# EAGLE board EqualzVer2Duel (EAGLE 5.10)
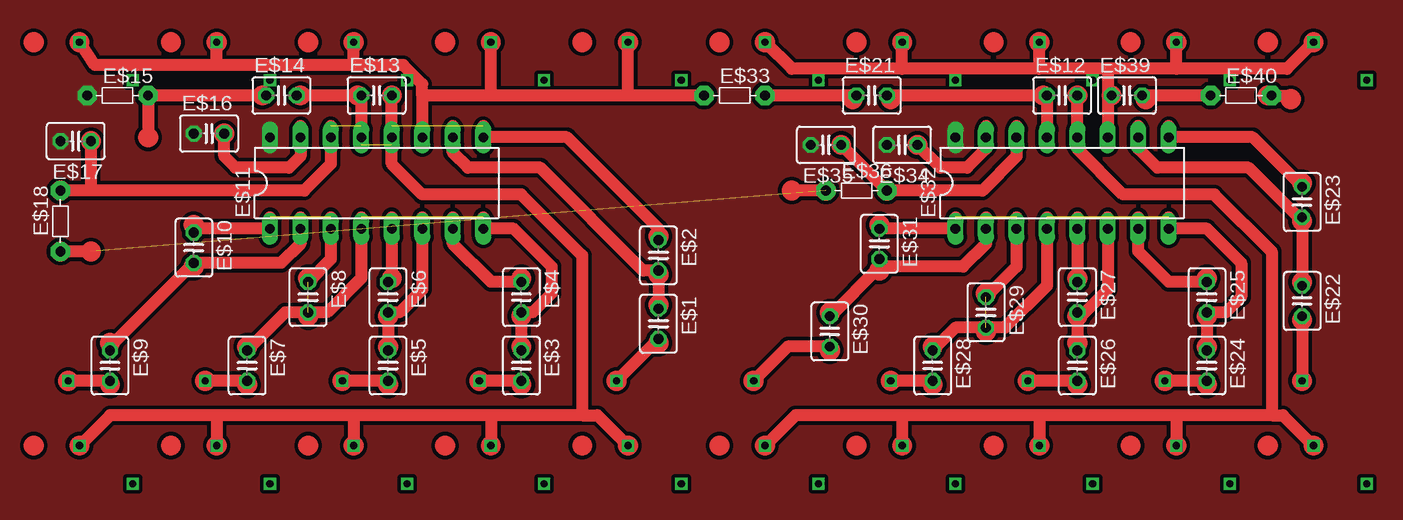
[diagram p0: board, top side]

No outline drawn. Coordinates in mm, seen from the top.
Copper layers (1*16): Top 0.035mm / dielectric 1.5mm / Bottom 0.035mm
Design rules "default": minimum track width 10mil, minimum drill 24mil, track to track 8mil, track to pad 8mil, pad to pad 8mil, via to via 8mil, smd to smd 8mil, copper to edge 40mil, drill to drill 8mil, minimum pad ring 10mil, minimum via ring 8mil, stop-mask expansion 4mil, vias tented up to drill 0mil, thermal gap 10mil

## Footprints (pad centres in the part's own frame; a part is rotated, then mirrored left to right if it is on the bottom)
C025-030X050 = drill 0.813 octagon: 1 -1.27,0; 2 1.27,0
DIL16 = drill 0.813 long: 1 -8.89,-3.81; 2 -6.35,-3.81; 3 -3.81,-3.81; 4 -1.27,-3.81; 5 1.27,-3.81; 6 3.81,-3.81; 7 6.35,-3.81; 8 8.89,-3.81; 9 8.89,3.81; 10 6.35,3.81; 11 3.81,3.81; 12 1.27,3.81; 13 -1.27,3.81; 14 -3.81,3.81; 15 -6.35,3.81; 16 -8.89,3.81
R-5 = drill 0.813 pad 1.6 octagon: 1 -2.54,0; 2 2.54,0

## Placement (x,y rotation side)
E$1  0.0012  [C025-030X050]  50.8,12.7 270 top
E$2  0.022  [C025-030X050]  50.8,18.41 270 top
E$3  0.0012  [C025-030X050]  39.37,9.21 270 top
E$4  0.022  [C025-030X050]  39.37,14.92 270 top
E$5  0.0012  [C025-030X050]  28.26,9.21 270 top
E$6  0.022  [C025-030X050]  28.26,14.92 270 top
E$7  0.0012  [C025-030X050]  16.51,9.21 270 top
E$8  0.022  [C025-030X050]  21.59,14.92 270 top
E$9  0.0012  [C025-030X050]  5.08,9.21 270 top
E$10  0.022  [C025-030X050]  12.06,19.05 270 top
E$11  [DIL16]  27.3,24.45 0 top
E$12  100pf  [C025-030X050]  84.45,31.75 0 top
E$13  100pf  [C025-030X050]  27.3,31.75 0 top
E$14  3.3UF  [C025-030X050]  19.37,31.75 0 top
E$15  10K  [R-5]  5.71,31.75 0 top
E$16  22UF  [C025-030X050]  13.34,28.57 0 top
E$17  47UF  [C025-030X050]  2.22,27.94 180 top
E$18  100  [R-5]  0.95,21.27 90 top
E$21  3.3UF  [C025-030X050]  68.58,31.75 0 top
E$22  0.0012  [C025-030X050]  104.46,14.61 270 top
E$23  0.022  [C025-030X050]  104.46,22.86 270 top
E$24  0.0012  [C025-030X050]  96.52,9.21 270 top
E$25  0.022  [C025-030X050]  96.52,14.92 270 top
E$26  0.0012  [C025-030X050]  85.72,9.21 270 top
E$27  0.022  [C025-030X050]  85.72,14.92 270 top
E$28  0.0012  [C025-030X050]  73.66,9.21 270 top
E$29  0.022  [C025-030X050]  78.11,13.65 270 top
E$30  0.0012  [C025-030X050]  65.09,12.06 270 top
E$31  0.022  [C025-030X050]  69.22,19.37 270 top
E$32  [DIL16]  84.45,24.45 0 top
E$33  10K  [R-5]  57.15,31.75 0 top
E$34  22UF  [C025-030X050]  71.12,27.62 180 top
E$35  47UF  [C025-030X050]  64.77,27.62 180 top
E$36  100  [R-5]  67.31,23.81 0 top
E$39  100pf  [C025-030X050]  89.85,31.75 0 top
E$40  10K  [R-5]  99.38,31.75 0 top

## Library data of the parts
E$1-E$10 E$12-E$14 E$16 E$17 E$21-E$31 E$34 E$35 E$39 = rcl
E$11 E$32 = 40xx
E$15 E$18 E$33 E$36 E$40 = discrete

## Nets
12V: E$18.1 E$36.1
GND: E$11.16 E$15.1 E$16.1 E$17.2 E$32.16 E$34.2 E$35.2
S$3: E$9.2
S$6: E$7.2
S$9: E$5.2
S$10: E$33.1
S$13: E$3.2
S$14: E$31.1 E$32.1
S$18: E$32.15 E$34.1
S$20: E$16.2
S$22: E$30.1 E$32.2
S$23: E$27.1 E$32.5
S$25: E$24.1 E$25.2 E$32.8
S$26: E$23.1 E$32.9
S$27: E$14.1
S$28: E$12.2 E$32.12
S$29: E$12.1 E$21.2 E$32.13
S$31: E$25.1 E$28.1 E$29.1 E$29.2 E$32.3 E$32.4
S$33: E$1.2
S$35: E$30.2
S$36: E$11.1
S$37: E$27.2 E$32.6
S$39: E$5.1 E$6.2 E$11.6
S$40: E$1.1 E$2.2 E$11.10
S$41: E$10.2 E$11.2
S$43: E$11.5
S$47: E$28.2
S$48: E$3.1 E$4.2 E$11.8
S$49: E$2.1 E$11.9
S$51: E$11.13 E$13.1 E$14.2
S$52: E$11.12 E$13.2 E$18.2
S$57: E$22.1 E$23.2
S$59: E$26.2
S$60: E$21.1 E$33.2
S$61: E$40.1
S$63: E$40.2
S$66: E$32.14 E$35.1 E$36.2
S$69: E$4.1 E$7.1 E$8.1 E$8.2 E$11.4 E$11.7
S$71: E$24.2
S$72: E$17.1
S$83: E$22.2

## Tracks (layer width: path | path; a pad name or v marks a point on that pad's centre or on a via)
12V  (1 unrouted)
  Top 1.016: 3.49,18.73 E$18.1
GND
  pour Top (isolate 0.305, no thermals): 120.33,47.94 -13.97,47.94 -13.97,-22.86 120.33,-22.86
S$1  (via drill 0.6)
  other vias: 109.86,-0.64
S$2  (via drill 0.6)
  other vias: 109.86,33.02
S$3  (via drill 0.6)
  Top 1.016: E$9.2 v1.59,7.94
S$4  (via drill 0.6)
  other vias: 98.42,-0.64
S$5  (via drill 0.6)
  other vias: 98.42,33.02
S$6  (via drill 0.6)
  Top 1.016: E$7.2 v13.02,7.94
S$7  (via drill 0.6)
  other vias: 87,-0.64
S$8  (via drill 0.6)
  other vias: 87,33.02
S$9  (via drill 0.6)
  Top 1.016: E$5.2 v24.45,7.94
S$10  (via drill 0.6)
  Top 1.016: 31.11,31.75 31.11,32.7 29.53,34.29 25.4,34.29 | 31.11,31.75 31.11,27.94 | 48.26,31.75 v48.26,36.2 | 36.83,31.75 v36.83,36.2 | 25.4,34.29 v25.4,36.2 | 25.4,34.29 13.97,34.29 | 13.97,34.29 v13.97,36.2 | 13.97,34.29 3.81,34.29 v2.54,36.2 | E$33.1 48.26,31.75 | 48.26,31.75 36.83,31.75 | 36.83,31.75 31.11,31.75
S$11  (via drill 0.6)
  other vias: 75.56,-0.64
S$12  (via drill 0.6)
  other vias: 75.56,33.02
S$13  (via drill 0.6)
  Top 1.016: E$3.2 v35.88,7.94
S$14
  Top 1.016: E$32.1 E$31.1
S$15  (via drill 0.6)
  other vias: 64.14,-0.64
S$16  (via drill 0.6)
  other vias: 64.14,33.02
S$17
  Top 1.016: 64.45,23.81 61.91,23.81
S$18
  Top 1.016: E$34.1 74.3,25.72 76.52,25.72 78.11,27.3 E$32.15 78.11,29.21
S$20
  Top 1.016: E$16.2 14.61,26.67 15.56,25.72 20,25.72 20.95,26.67 20.95,29.21
S$22
  Top 1.016: E$30.1 69.22,17.46 76.2,17.46 78.11,19.37 E$32.2
S$23
  Top 1.016: E$32.5 E$27.1
S$25
  Top 1.016: E$24.1 E$25.2 98.11,13.65 99.38,14.92 99.38,17.78 96.52,20.64 E$32.8
S$26
  Top 1.016: E$32.9 100.33,28.26 E$23.1
S$27
  Top 1.016: E$14.1 8.26,31.75 8.26,28.26
S$28  (via drill 0.6)
  Top 1.016: E$12.2 E$32.12 85.72,27.3 89.53,23.5 97.16,23.5 101.92,18.73 101.92,5.08 | v105.41,2.54 102.87,5.08 101.92,5.08 | 101.92,5.08 93.98,5.08 | 93.98,5.08 82.55,5.08 | 82.55,5.08 71.12,5.08 | 71.12,5.08 62.23,5.08 v59.69,2.54 | 71.12,5.08 v71.12,2.54 | 82.55,5.08 v82.55,2.54 | 93.98,5.08 v93.98,2.54
S$29
  Top 1.016: E$32.13 E$12.1 E$21.2
S$31  (7 unrouted)
  Top 1.016: 75.56,21.59 75.56,20 | 78.11,21.59 78.11,20 | E$32.3 80.64,21.59 | E$32.3 80.64,20 | E$32.3 80.64,17.46 E$29.1 | E$28.1 75.56,12.38 E$29.2 79.69,12.38 83.19,15.88 E$32.4 | E$32.4 83.19,20 | E$32.4 83.19,21.59 | 85.72,21.59 85.72,20 | 93.34,21.59 93.34,20 | 88.27,21.59 88.27,20 | 90.81,21.59 90.81,18.73 93.34,16.19 E$25.1
S$32  (via drill 0.6)
  other vias: 52.7,-0.64
S$33  (via drill 0.6)
  Top 1.016: E$1.2 v47.31,7.94
S$34  (via drill 0.6)
  other vias: 52.7,33.02
S$35  (via drill 0.6)
  Top 1.016: E$30.2 61.59,10.79 v58.74,7.94
S$36
  Top 1.016: E$11.1 12.06,20.64
S$37
  Top 1.016: 85.72,11.43 E$27.2 86.36,13.65 88.27,15.56 E$32.6
S$39
  Top 1.016: E$5.1 E$6.2 29.21,13.65 31.11,15.56 E$11.6
S$40
  Top 1.016: E$1.1 E$2.2 49.53,17.14 40.96,25.72 34.92,25.72 33.66,26.99 E$11.10
S$41
  Top 1.016: 5.08,10.79 E$10.2 19.37,17.78 20.95,19.37 E$11.2
S$43
  Top 1.016: E$11.5 28.57,16.19
S$44  (via drill 0.6)
  other vias: 41.27,-0.64
S$46  (via drill 0.6)
  other vias: 41.27,33.02
S$47  (via drill 0.6)
  Top 1.016: E$28.2 v70.17,7.94
S$48
  Top 1.016: E$3.1 E$4.2 40.32,13.65 41.91,15.24 41.91,17.46 38.73,20.64 E$11.8
S$49
  Top 1.016: E$2.1 50.8,20.64 43.18,28.26 E$11.9
S$51
  Top 1.016: E$11.13 E$13.1 E$14.2
S$52  (via drill 0.6)  (5 unrouted)
  Top 1.016: v2.54,2.54 5.08,5.08 13.97,5.08 | 13.97,5.08 v13.97,2.54 | 25.4,5.08 13.97,5.08 | 25.4,5.08 v25.4,2.54 | E$18.2 21.27,23.81 23.5,26.04 23.5,29.21 | 36.83,5.08 25.4,5.08 | 36.83,5.08 v36.83,2.54 | v48.26,2.54 45.72,5.08 44.45,5.08 | 44.45,5.08 36.83,5.08 | 44.45,5.08 44.45,18.41 39.37,23.5 31.11,23.5 28.57,26.04 E$11.12 | 26.04,29.21 26.04,27.62 | E$11.12 28.57,27.62 | E$11.12 E$13.2 | E$11.12 28.57,29.21 | 31.11,29.21 31.11,27.62 | 33.66,29.21 33.66,27.62 | 36.2,29.21 36.2,27.62
S$55
  Top 1.016: 93.34,29.21 93.34,27.62
S$56  (via drill 0.6)
  other vias: 29.84,-0.64
S$57
  Top 1.016: 90.81,29.21 90.81,27.3 92.39,25.72 100.01,25.72 104.14,21.59 E$23.2 E$22.1
S$58  (via drill 0.6)
  other vias: 29.84,33.02
S$59  (via drill 0.6)
  Top 1.016: E$26.2 v81.6,7.94
S$60
  Top 1.016: E$21.1 E$33.2
S$61
  Top 1.016: E$40.1 91.12,31.75
S$62
  Top 1.016: 88.27,29.21 88.27,27.62
S$63
  Top 1.016: E$40.2 103.5,31.75
S$64
  Top 1.016: 85.72,29.21 85.72,27.62
S$65
  Top 1.016: 83.19,29.21 83.19,27.62
S$66
  Top 1.016: E$32.14 80.64,29.21 | E$32.14 80.64,27.62 | E$35.1 E$36.2 77.79,23.81 80.64,26.67 E$32.14
S$67  (via drill 0.6)
  Top 1.016: 88.27,33.97 88.27,27.94 | 93.98,33.97 88.27,33.97 | 93.98,33.97 103.19,33.97 v105.41,36.2 | 93.98,33.97 v93.98,36.2 | 88.27,33.97 82.55,33.97 | 82.55,33.97 v82.55,36.2 | 82.55,33.97 71.12,33.97 | 71.12,33.97 v71.12,36.2 | 71.12,33.97 61.91,33.97 v59.69,36.2
S$68  (via drill 0.6)
  other vias: 18.41,-0.64
S$69  (7 unrouted)
  Top 1.016: 18.41,21.59 18.41,20 | 20.95,21.59 20.95,20 | E$11.4 26.04,21.59 | E$11.4 26.04,20 | 28.57,21.59 28.57,20 | 31.11,21.59 31.11,20 | E$11.7 33.66,21.59 | E$11.7 33.66,20 | 36.2,21.59 36.2,20 | 23.5,21.59 23.5,18.1 E$8.1 | E$7.1 19.68,13.65 E$8.2 23.18,13.65 26.04,16.51 E$11.4 | E$4.1 36.83,16.19 33.66,19.37 E$11.7
S$70  (via drill 0.6)
  other vias: 18.41,33.02
S$71  (via drill 0.6)
  Top 1.016: E$24.2 v93.03,7.94
S$72
  Top 1.016: E$17.1 3.49,24.13
S$80  (via drill 0.6)
  other vias: 6.99,-0.64
S$82  (via drill 0.6)
  other vias: 6.99,33.02
S$83  (via drill 0.6)
  Top 1.016: E$22.2 v104.46,7.94
(copper drawn outside any net)
  shapes: Top circle x117

## Text on the board
Unrouted: VCC | VCC | VCC | VCC | VCC | VCC | VCC | VCC | VCC | VCC | in | OUT | 16 | 15 | 14 | 13 | 12 | 11 | 10 | 9 | 16 | 15 | 14 | 13 | 12 | 11 | 10 | 9 | 1 | 2 | 3 | 4 | 5 | 6 | 7 | 8 | 1 | 2 | 3 | 4 | 5 | 6 | 7 | 8 | OUT | OUT | OUT | OUT | OUT | OUT | OUT | OUT | OUT | OUT | GND | GND | GND | GND | GND | GND | GND | GND | GND | GND